# Altium PCB COTS_REVB.PcbDoc
Units mm, origin at the board's own origin, x right, y up, seen from the top; angles counter-clockwise.
Board outline 95.88 x 101.01 mm, 4 copper layers (Top Layer, Layer 1, Layer 2, Bottom Layer), stack 1.586 mm thick; 22 components, 71 nets, 135 pads, 19 vias.
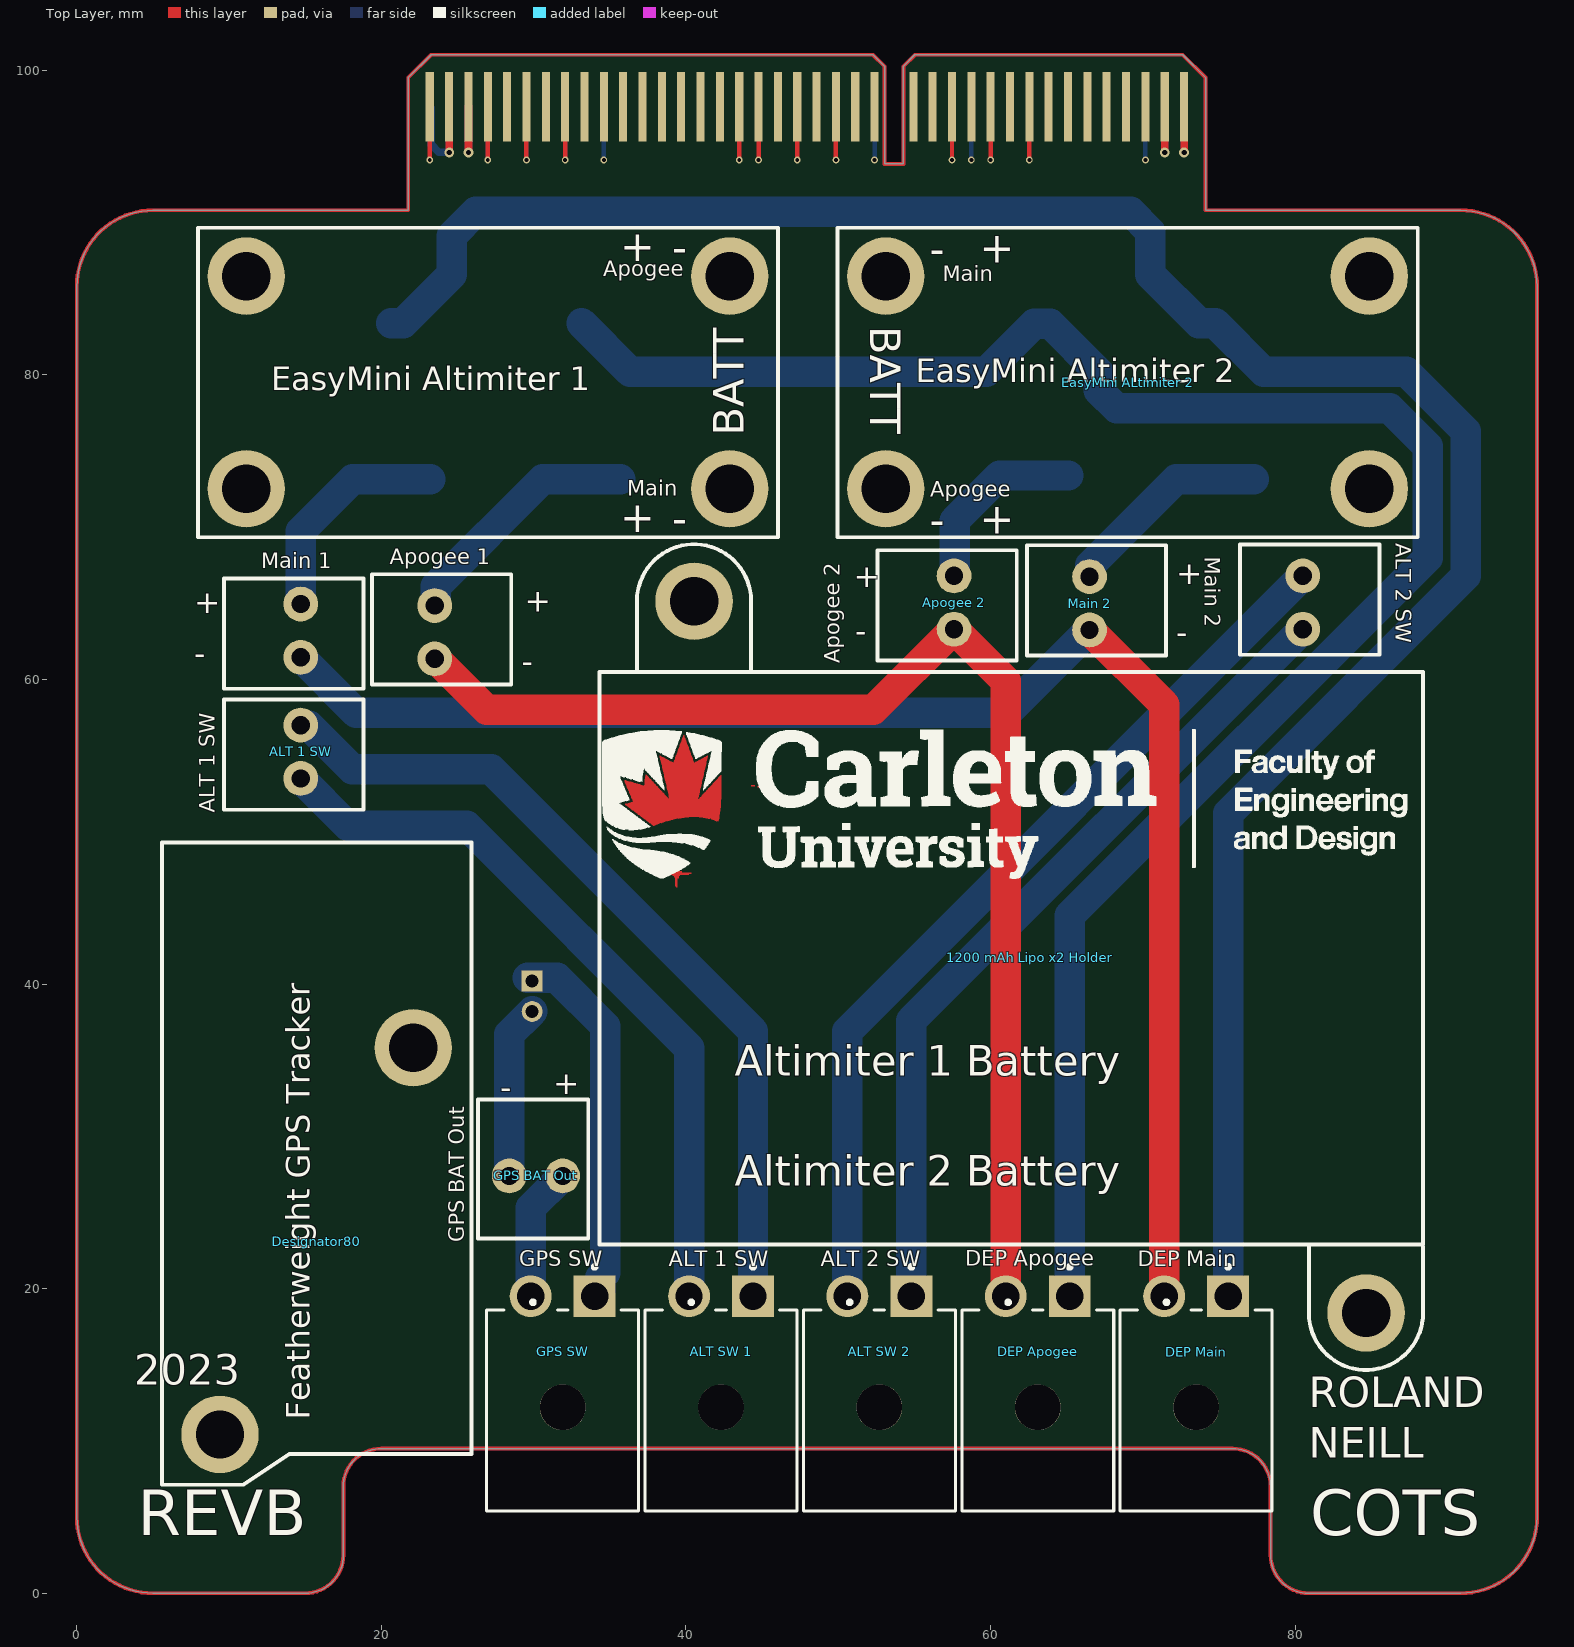
[diagram p0: Top Layer view]
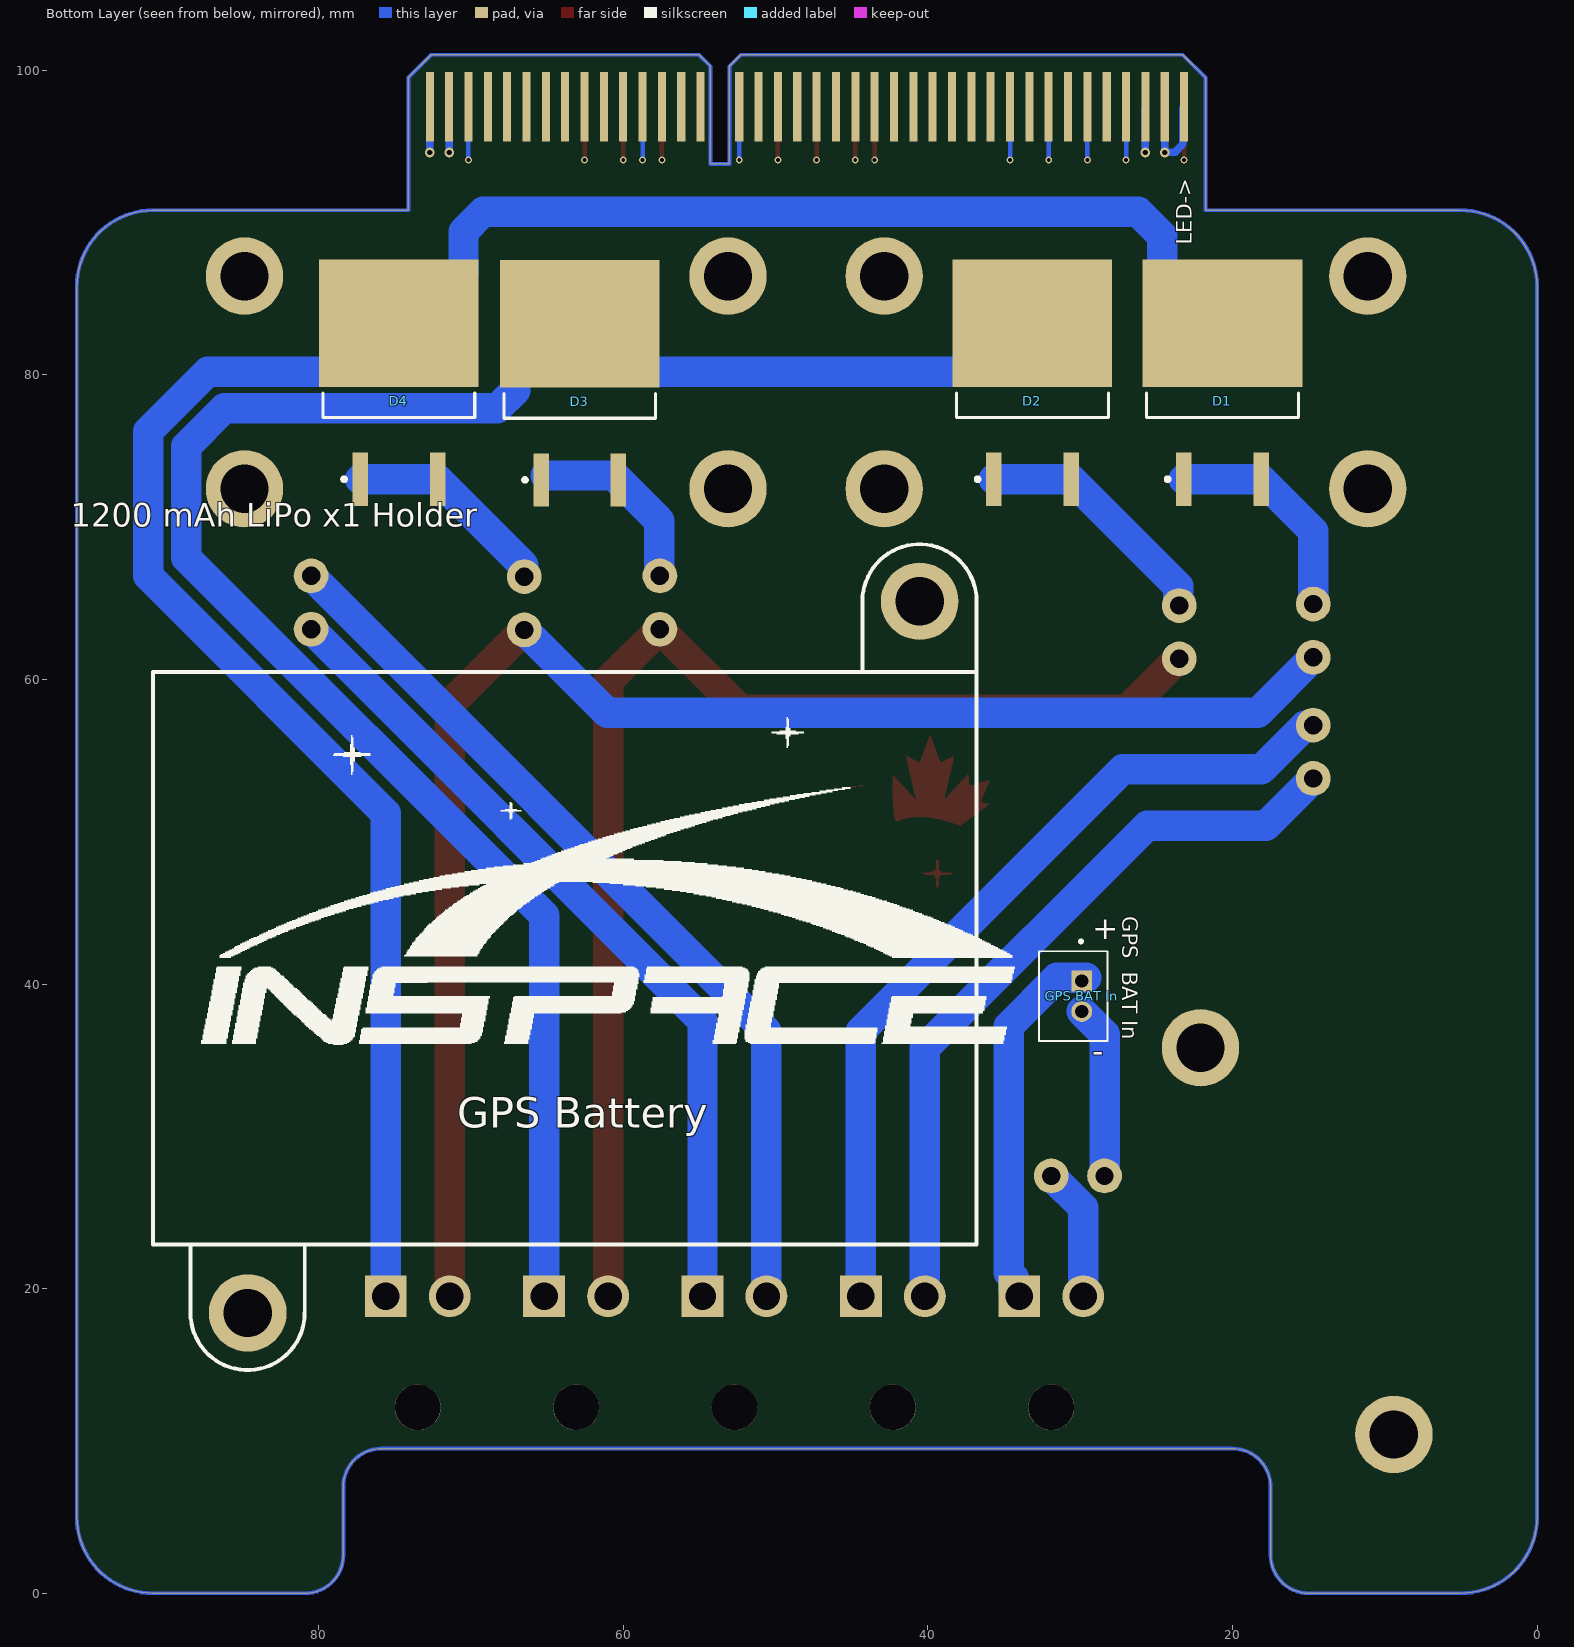
[diagram p1: Bottom Layer view, seen from below]
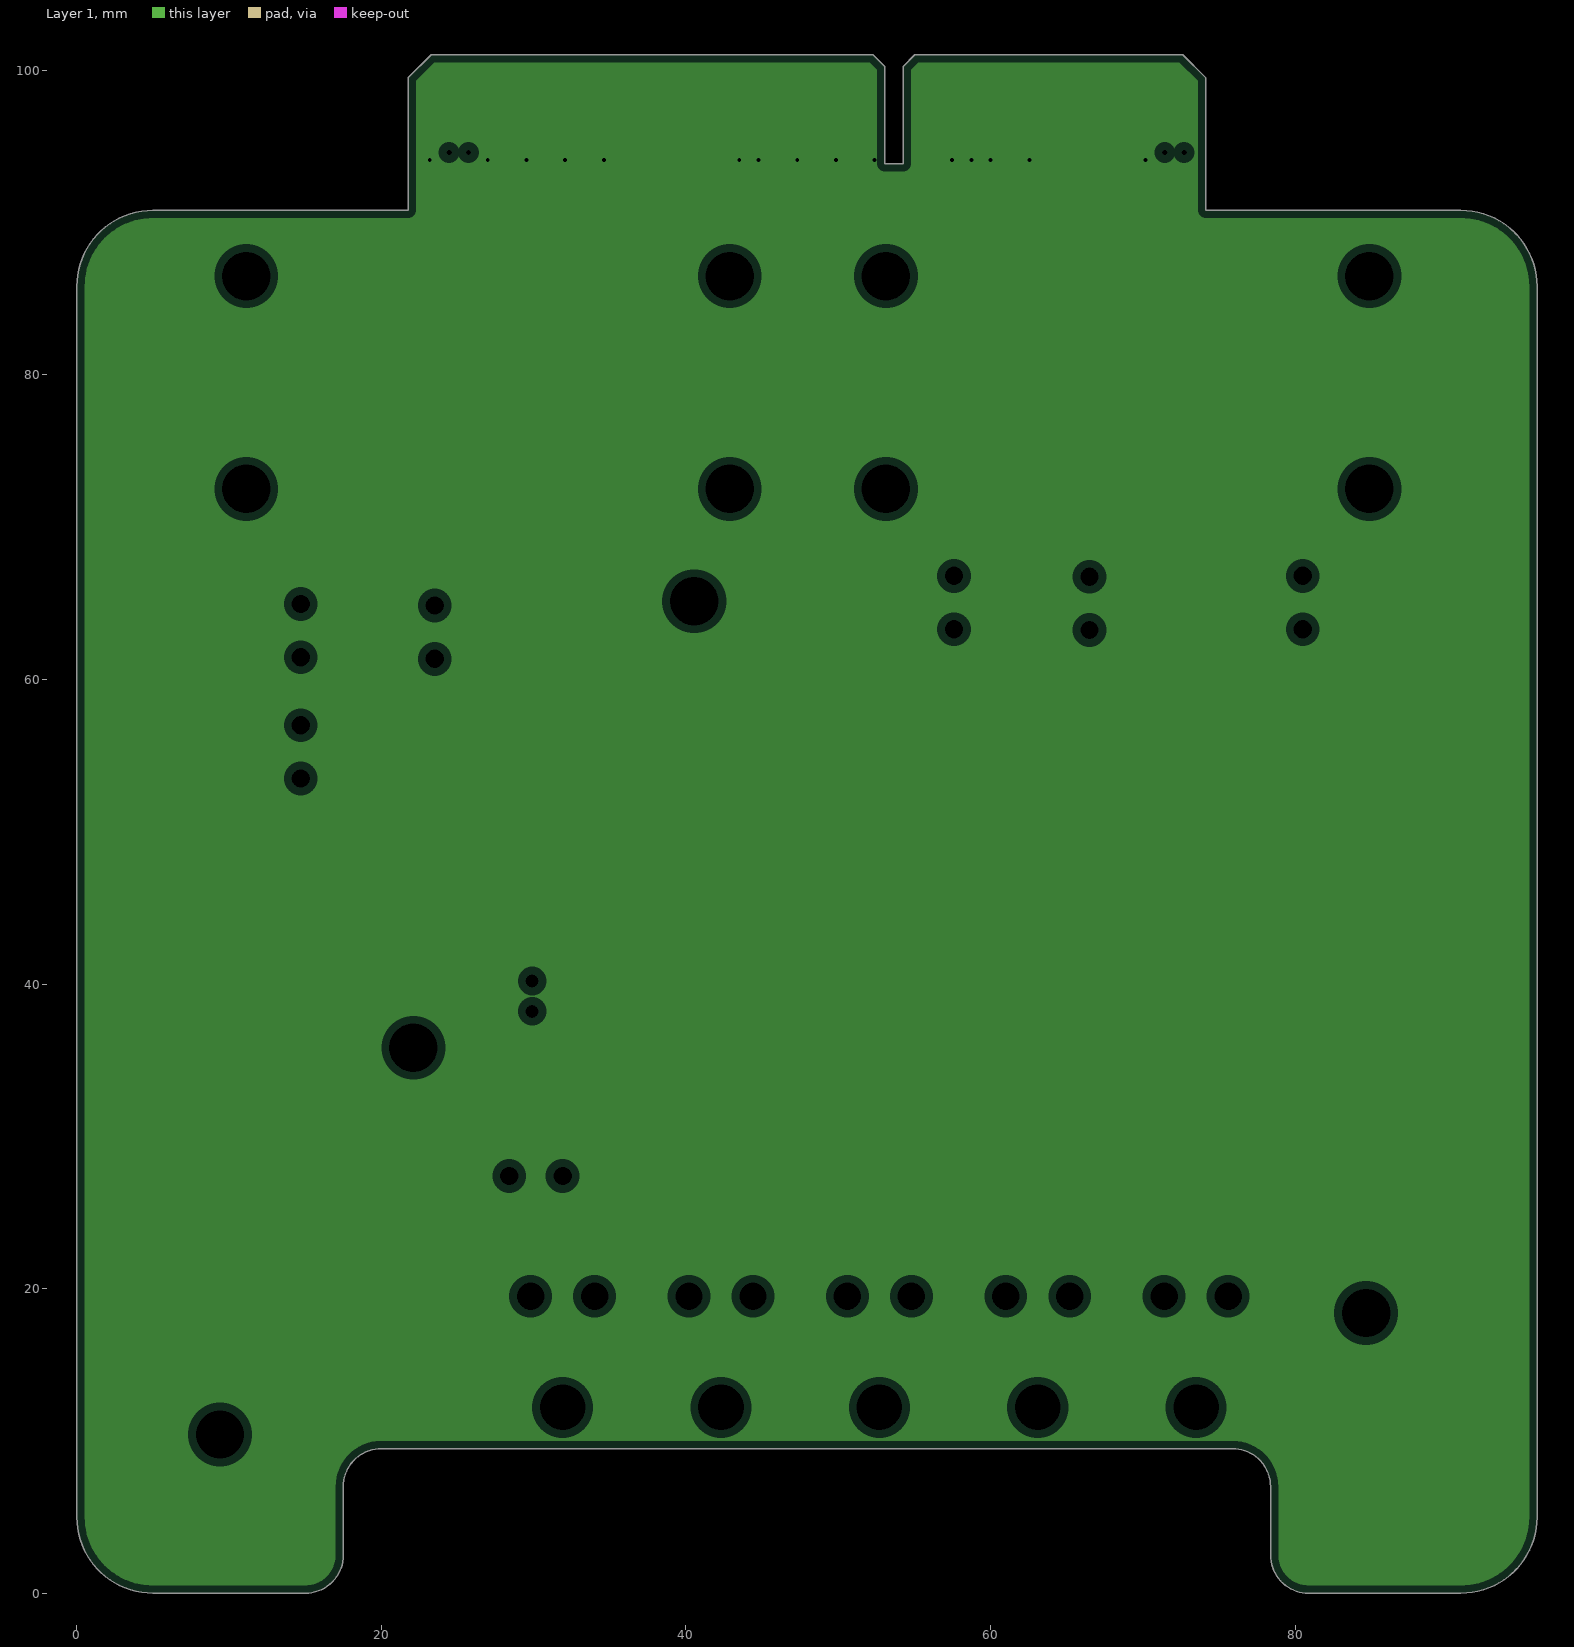
[diagram p2: Layer 1, clearances drawn from the general rule]
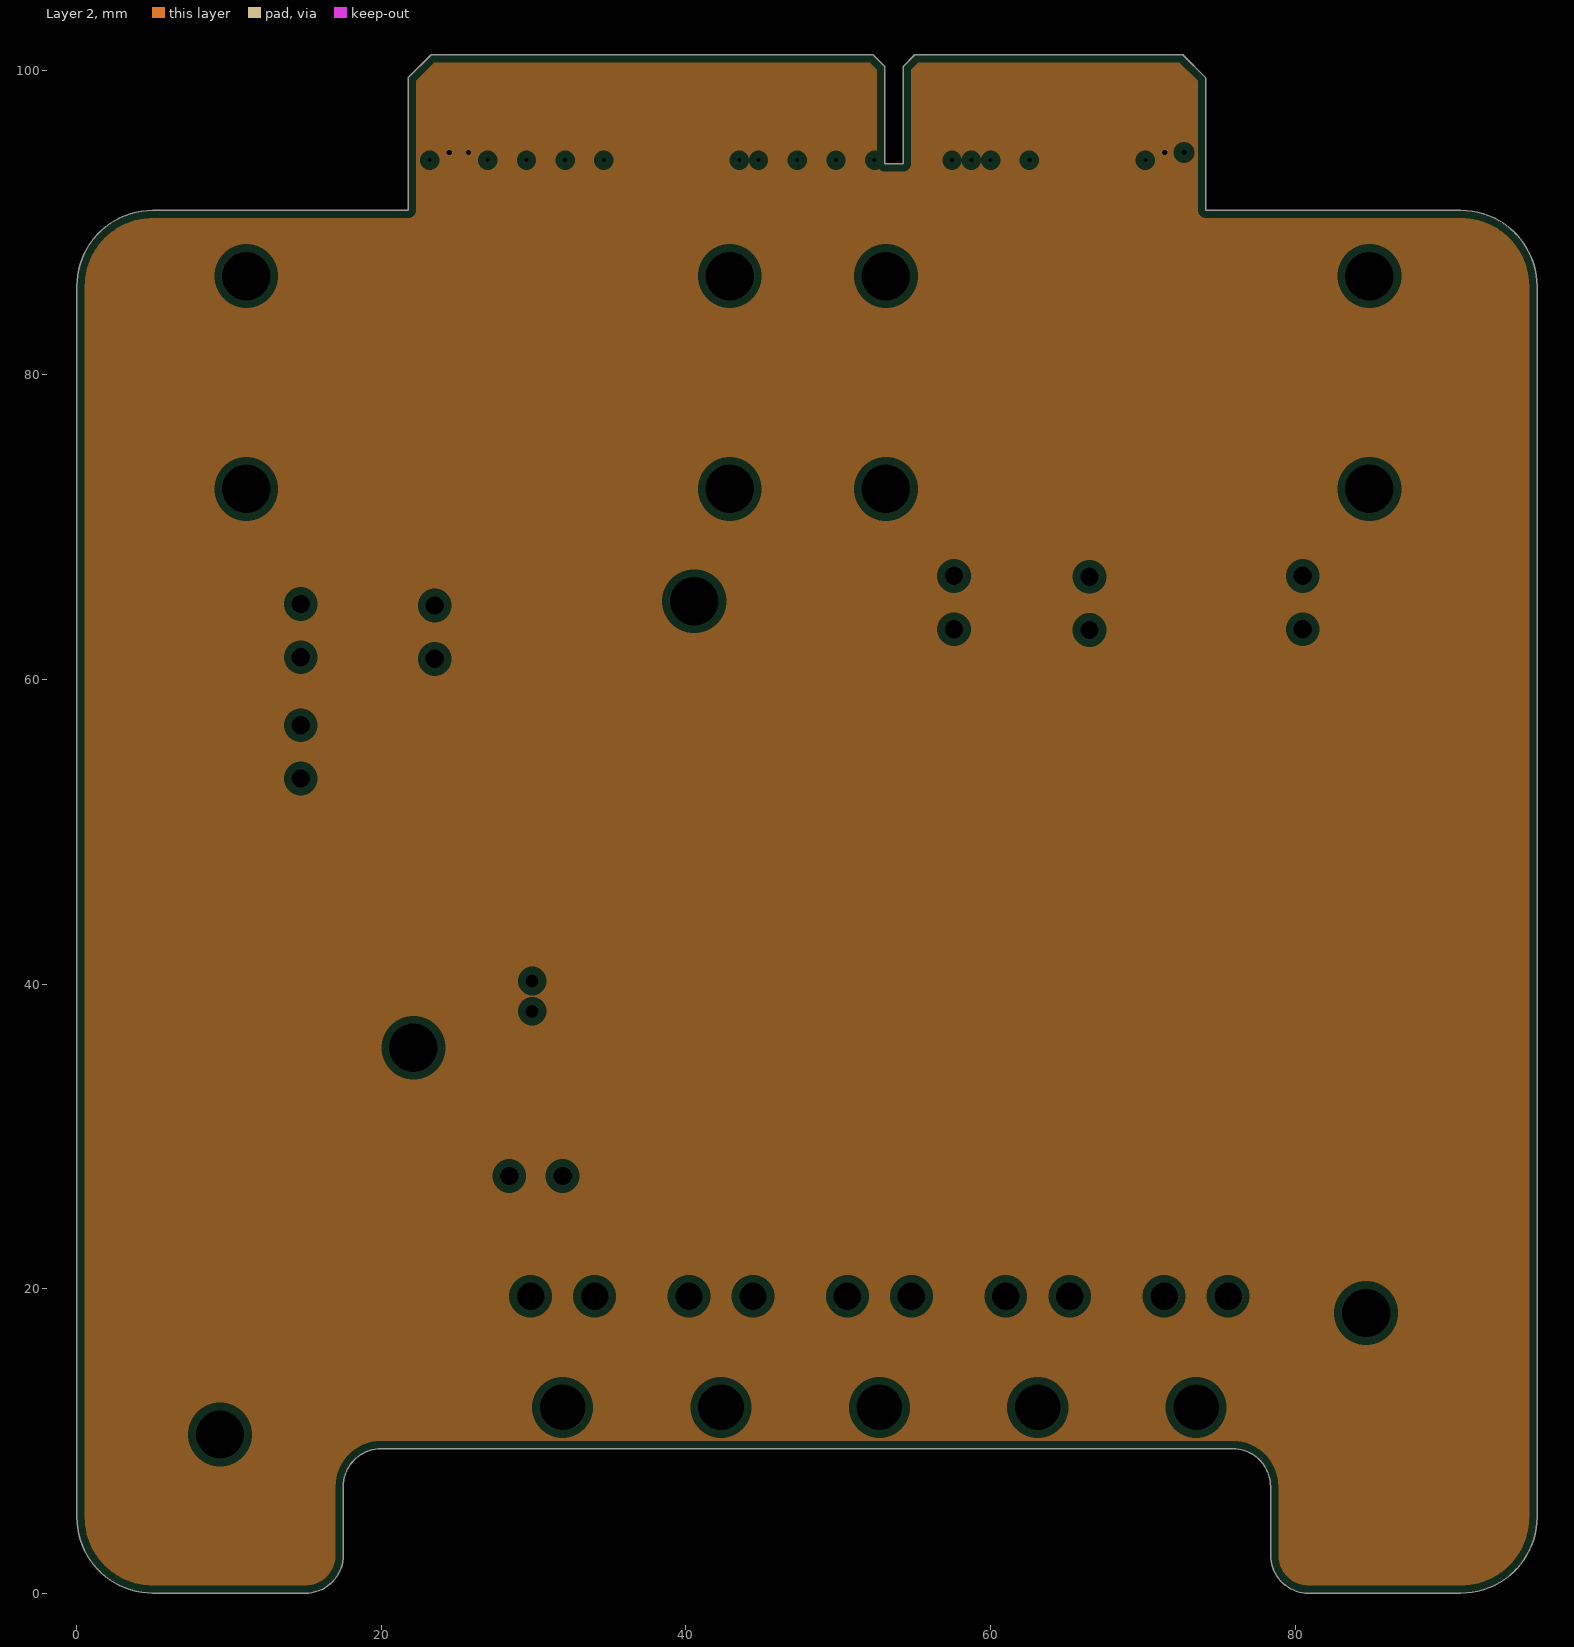
[diagram p3: Layer 2, clearances drawn from the general rule]
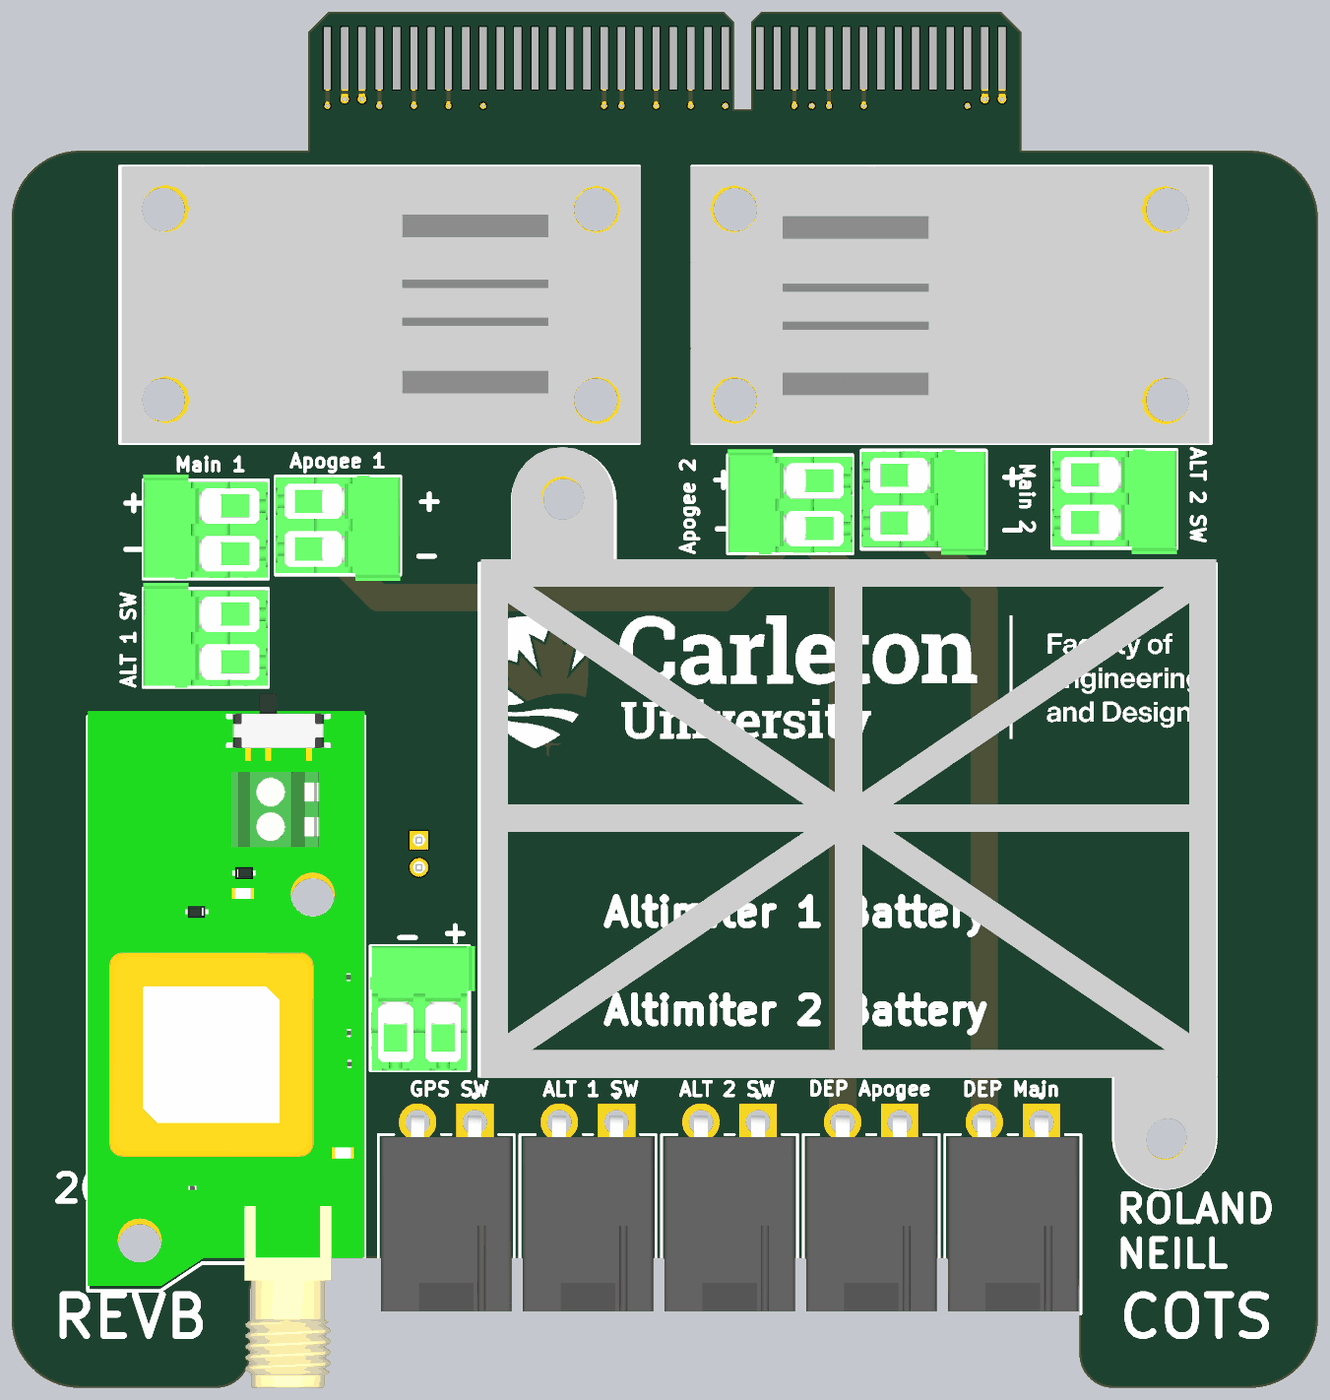
[diagram p4: 3D render of the assembled board from above, using the file's embedded part models]

## Layer stack, top to bottom
Top Solder: solder mask 0.0203, Solder Resist, Dk 3.8
Top Layer: signal copper 0.035
Dielectric 2: prepreg 0.2104, PP-006, Dk 4.6
Layer 1: plane copper 0.0152, net GND
Dielectric 1: dielectric 1.065, FR-4, Dk 4.6
Layer 2: plane copper 0.0152, net +3.3V
Dielectric 3: prepreg 0.2104, PP-006, Dk 4.6
Bottom Layer: signal copper 0.035
Bottom Solder: solder mask 0.0203, Solder Resist, Dk 3.8

## Board outline
5,0 15,0 ccw(c15,2.5) 17.5,2.5 17.5,7 cw(c20,7) 20,9.5 75.885,9.5 cw(c75.885,7) 78.385,7 78.385,2.5 ccw(c80.885,2.5) 80.885,0 90.885,0 ccw(c90.885,5) 95.885,5 95.885,85.805 ccw(c90.885,85.805) 90.885,90.805 74.117,90.805 74.117,99.517 72.617,101.015 55.027,101.015 54.277,100.265 54.277,93.855 53.037,93.855 53.037,100.265 52.287,101.015 23.267,101.015 21.767,99.517 21.768,90.805 5,90.805 ccw(c5,85.805) 0,85.805 0,5 ccw(c5,5)

## Design rules (kind name [scope] priority, off if disabled: settings)
Clearance [All] p1: gap=0.254 ignorepadtopadclearanceinfootprint=TRUE except(0: Arc-Hole Track-Hole SMDPad-Hole THPad-Hole Via-Hole Fill-Hole Poly-Hole Region-Hole Text-Hole; 0.127: Arc-Arc Arc-Track Track-Track SMDPad-SMDPad THPad-THPad)
Height [All] p1: minheight=0 maxheight=15 prefheight=12.7
PlaneClearance [All] p1: clearance=0.508
PlaneConnect [All] p1: pad.planeconnectstyle=Relief pad.reliefexpansion=0.508 pad.reliefentries=4 pad.reliefconductorwidth=0.254 pad.reliefairgap=0.254 via.planeconnectstyle=Direct via.reliefexpansion=0.508 via.reliefentries=4 via.reliefconductorwidth=0.254 via.reliefairgap=0.254
PolygonConnect [All] p1: connectstyle=Relief reliefconductorwidth=0.254 reliefentries=4 polygonreliefangle="90 Angle" airgapwidth=0.254
RoutingVias [All] p1: holewidth=0.254 width=0.445 viastyle="Through Hole" minholewidth=0.2 minwidth=0.4 maxholewidth=6.3 maxwidth=6.4
SolderMaskExpansion [All] p1: expansion=0.102 istentingtop=FALSE
Width [All] p1: maxlimit=4 minlimit=0.127 preferedwidth=0.293 minimp=50.000000 maximp=50.000000 favimp=50.000000
27 further rules are at their usual default settings.

## Components (designator, comment, footprint, x,y, rotation, side; value= is the part's Value field where it differs from the comment)
"1200 mAh LiPo x1 Holder" "1200mAh LiPo x1 Holder" "LiPo Holder-Footprint-1"#1 93.3,22.4 r180 bottom
"1200 mAh Lipo x2 Holder" "" "LiPo Holder-Footprint-1"#2 31.9,22.4 r0 top (schematic designator "1200 mAh LiPo x2 Holder")
"ALT 1 SW" "1984769" 1984769-Footprint-1#1 17.8,55.25 r0 top
"ALT 2 SW" "1984769" 1984769-Footprint-1#1 77.4,65.05 r180 top
"ALT SW 1" "CMP-04776-000216-1" FP-172648-0102-MFG 42.3,12 r0 top
"ALT SW 2" "CMP-04776-000216-1" FP-172648-0102-MFG 52.7,12 r0 top
"Apogee 1" "1984769" 1984769-Footprint-1#1 20.4,63.1 r180 top
"Apogee 2" "1984769" 1984769-Footprint-1#1 60.7,65.05 r0 top
D1 "MBRB2545CTT4G" ONSC-D2PAK-3-418B-04_V 20.66,79.5 r90 bottom
D2 "MBRB2545CTT4G" ONSC-D2PAK-3-418B-04_V 33.14,79.5 r90 bottom
D3 "MBRB2545CTT4G" ONSC-D2PAK-3-418B-04_V 62.86,79.45 r90 bottom
D4 "MBRB2545CTT4G" ONSC-D2PAK-3-418B-04_V 74.74,79.5 r90 bottom
"DEP Apogee" "CMP-04776-000216-1" FP-172648-0102-MFG 63.1,12 r0 top
"DEP Main" "CMP-04776-000216-1" FP-172648-0102-MFG 73.5,12 r0 top
Designator80 "Comment" Featherweight-Footprint-1 5.59,7.119 r90 top
"EasyMini Altimiter 1" "EasyMini" EasyMini-Footprint-1 27,79.5 r180 top
"EasyMini ALtimiter 2" "EasyMini" EasyMini-Footprint-1 69,79.5 r0 top (schematic designator "EasyMini Altimiter 2")
"GPS BAT In" "B2B-PH-K-S(LF)(SN)" JST_B2B-PH-K-S(LF)(SN) 30.45,39.2 r90 bottom
"GPS BAT Out" "1984769" 1984769-Footprint-1#2 30.15,24.3 r270 top
"GPS SW" "CMP-04776-000216-1" FP-172648-0102-MFG 31.9,12 r0 top
"Main 1" "1984769" 1984769-Footprint-1#1 17.8,63.2 r0 top
"Main 2" "1984769" 1984769-Footprint-1#1 63.4,65 r180 top

## Footprints (in the part's own frame and the unit in brackets; to place one, negate y for a bottom-side part, rotate by r counter-clockwise, add the part's x,y. Pads: shape width x height; smd on the part's side, far side on the other; paste and mask are expansions set on the pad)
1984769-Footprint-1#1 [mm]
  round 2.286 hole 1.2: 1(-3.1,1.75) 2(-3.1,-1.75)
  silkscreen extent -8.13,-3.81 1.02,3.43, body extent -8.13,-3.85 1.02,3.85, height 7.55
1984769-Footprint-1#2 [mm]
  round 2.286 hole 1.2: 1(-3.1,1.75) ""(-3.1,-1.75)
  silkscreen extent -8.13,-3.81 1.02,3.43, body extent -8.13,-3.85 1.02,3.85, height 7.55
EasyMini-Footprint-1 [mm]
  round 5.08 hole 3.175: 80(-15.875,6.985) 81(15.875,6.985) 82(15.875,-6.985) 83(-15.875,-6.985)
  silkscreen extent -19.05,-10.16 19.05,10.16, body extent -19.18,-10.18 18.92,10.15, height 14.08
Featherweight-Footprint-1 [mil]
  round 200 hole 125: 84(130,-150) 85(1130,-650)
  silkscreen extent 0,-800 1660,0, body extent -280,-800 1729,0, height 556
FP-172648-0102-MFG [mm]
  rect 2.75x2.75 hole 1.8 paste-1000 mask+0: 1(2.1,7.5)
  round 2.75 hole 1.8 paste-1000 mask+0: 2(-2.1,7.5)
  round 3 hole 3 unplated paste-1000 mask+0: ""(0,0.2)
  silkscreen extent -4.99,-6.59 4.99,9.55, body extent -5.09,-6.69 5.09,8.98, height 0.25
JST_B2B-PH-K-S(LF)(SN) [mm]
  rect 1.368x1.368 hole 0.86: 1(1,-0.55)
  round 1.368 hole 0.86: 2(-1,-0.55)
  silkscreen extent -2.95,-2.25 3.7,2.25, body extent -2.95,-2.25 2.95,2.25, height 6
"LiPo Holder-Footprint-1"#1 [mm]
  round 5.08 hole 3.175: 88(52.75,42.73) 89(8.627,-4)
  silkscreen extent 2.41,-7.75 56.5,46.48, body extent 2.41,-7.96 56.41,46.54, height 8
"LiPo Holder-Footprint-1"#2 [mm]
  round 5.08 hole 3.175: 88(8.627,42.73) 89(52.75,-4)
  silkscreen extent 2.41,-7.75 56.5,46.48, body extent 2.54,-7.84 56.54,46.66, height 14
ONSC-D2PAK-3-418B-04_V [mm] "DPAK, 3-Leads, Body 9.97x9.145mm, Pitch 2.54mm"
  rect 3.504x1.016 smd: 1(-6.35,2.54) 3(-6.35,-2.54)
  rect 8.38x10.49 smd: 4(3.9,0)
  silkscreen extent -6.47,-4.98 -0.69,4.98, body extent -2.3,-4.98 6.85,4.98, height 4.83

## Part data
"1200 mAh LiPo x1 Holder": library part CMP-00028-00013-3, "Holder for LiPo Pouch Type Battery"
"1200 mAh Lipo x2 Holder": library part CMP-00028-00011-11, "Holder for LiPo Pouch Type Battery"
"ALT 1 SW" "ALT 2 SW" "Apogee 1" "Apogee 2" "GPS BAT Out" "Main 1" "Main 2": library part CMP-00028-00010-2, "Terminal Block, Printed Circuit; 10 A; 160 V; 3.5 mm; 2; 3.5 mm; 1.2 mm; M2; PA"
"ALT SW 1" "ALT SW 2" "DEP Apogee" "DEP Main" "GPS SW": library part CMP-003-000005-1, "CONN HEADER R/A 2POS 4.2MM", Manufacturer=Molex, Manufacturer Part Number=172648-0102, Component Type=Standard, Design Item ID=CMP-04776-000216-1, Pin Count=2, Source=CON_REVD.SCHLIB
D1 D2 D3 D4: library part CMP-004-00032-1, "Rectifier Diode Schottky 45V 30A 3-Pin(2+Tab) D2PAK T/R", Case/Package=D2PAK
"EasyMini Altimiter 1" "EasyMini ALtimiter 2": library part CMP-00028-00008-4
"GPS BAT In": "PH Series 2 Position 2 mm Pitch Through Hole Top Entry Shrouded Header", Package=None, Availability=Unavailable, MF="{'manufacturer': u'JST Sales'}", MP=B2B-PH-K-S(LF)(SN), Price=None

## Free pads (board coordinates)
  rect 0.53x4.572 smd: 1(72.707,97.6) 3(71.437,97.6) 5(70.167,97.6) 7(68.897,97.6) 9(67.627,97.6) 11(66.357,97.6) 13(65.087,97.6) 15(63.817,97.6) 17(62.547,97.6) 19(61.277,97.6) 21(60.007,97.6) 23(58.737,97.6) 25(57.467,97.6) 27(56.197,97.6) 29(54.927,97.6) 31(52.387,97.6) 33(51.117,97.6) 35(49.847,97.6) 37(48.577,97.6) 39(47.307,97.6) 41(46.037,97.6) 43(44.767,97.6) 45(43.497,97.6) 47(42.227,97.6) 49(40.957,97.6) 51(39.687,97.6) 53(38.417,97.6) 55(37.147,97.6) 57(35.877,97.6) 59(34.607,97.6) 61(33.337,97.6) 63(32.067,97.6) 65(30.797,97.6) 67(29.527,97.6) 69(28.257,97.6) 71(26.987,97.6) 73(25.717,97.6) 75(24.447,97.6) 77(23.177,97.6)
  rect 0.53x4.572 smd far side: 2(72.707,97.6) 4(71.437,97.6) 6(70.167,97.6) 8(68.897,97.6) 10(67.627,97.6) 12(66.357,97.6) 14(65.087,97.6) 16(63.817,97.6) 18(62.547,97.6) 20(61.277,97.6) 22(60.007,97.6) 24(58.737,97.6) 26(57.467,97.6) 28(56.197,97.6) 30(54.927,97.6) 32(52.387,97.6) 34(51.117,97.6) 36(49.847,97.6) 38(48.577,97.6) 40(47.307,97.6) 42(46.037,97.6) 44(44.767,97.6) 46(43.497,97.6) 48(42.227,97.6) 50(40.957,97.6) 52(39.687,97.6) 54(38.417,97.6) 56(37.147,97.6) 58(35.877,97.6) 60(34.607,97.6) 62(33.337,97.6) 64(32.067,97.6) 66(30.797,97.6) 68(29.527,97.6) 70(28.257,97.6) 72(26.987,97.6) 74(25.717,97.6) 76(24.447,97.6) 78(23.177,97.6)

## Via types
v1: diameter 0.444, hole 0.254, Top Layer to Bottom Layer, 15 vias
v2: diameter 0.635, hole 0.356, Top Layer to Bottom Layer, 4 vias

## Nets (pads, with @x,y where several pads share a name; then routed paths per layer and width w, separated by ;. In a path a pad name is that pad's centre, name@x,y a point inside that pad or via, vN(x,y) a via of type N, cw(c..) or ccw(c..) an arc to the next point about the centre after c; other vN are vias at no path point)
+3.3V: pad.3 pad.4 pad.73 pad.74 pad.75 pad.76 pad.78 | length 21.9
  Top Layer w0.5: v2(24.447,94.6) pad.75 ; v2(25.717,94.6) pad.73 ; v2(71.437,94.6) pad.3
  Bottom Layer w0.5: pad.78 23.257,97.52 23.257,95.143 23.774,94.626 24.421,94.626 v2(24.447,94.6) pad.76 ; v2(25.717,94.6) pad.74 ; v2(71.437,94.6) pad.4
+5V: pad.1 pad.2 | length 6
  Top Layer w0.5: v2(72.707,94.6) pad.1
  Bottom Layer w0.5: v2(72.707,94.6) pad.2
A0: pad.22
A1: pad.20
A2: pad.18
A3: pad.16
A4: pad.14
A5: pad.12
A6: pad.10
A7: pad.8
A12: pad.31
A13: pad.33
DAC0: pad.41
DAC1: pad.37
GND: pad.6 pad.17 pad.21 pad.24 pad.25 pad.32 pad.35 pad.39 pad.43 pad.45 pad.60 pad.63 pad.64 pad.67 pad.68 pad.71 pad.72 pad.77 | length 63
  Top Layer w0.293: v1(23.177,94.1) pad.77 ; v1(26.987,94.1) pad.71 ; v1(29.527,94.1) pad.67 ; v1(32.067,94.1) pad.63 ; v1(43.497,94.1) pad.45 ; v1(44.767,94.1) pad.43 ; v1(47.307,94.1) pad.39 ; v1(49.847,94.1) pad.35 ; v1(57.467,94.1) pad.25 ; v1(60.007,94.1) pad.21 ; v1(62.547,94.1) pad.17
  Bottom Layer w0.293: v1(26.987,94.1) pad.72 ; v1(29.527,94.1) pad.68 ; v1(32.067,94.1) pad.64 ; v1(34.607,94.1) pad.60 ; v1(52.387,94.1) pad.32 ; v1(58.737,94.1) pad.24 ; v1(70.167,94.1) pad.6
GPIO0: pad.58
GPIO1: pad.56
GPIO2: pad.54
GPIO3: pad.52
GPIO4: pad.50
GPIO5: pad.48
GPIO6: pad.46
GPIO7: pad.44
GPIO8: pad.42
GPIO9: pad.40
GPIO10: pad.38
GPIO11: pad.36
GPIO12: pad.34
GPIO13: pad.30
GPIO14: pad.28
GPIO15: pad.26
GPIO22: pad.27
GPIO23: pad.29
I2C0_SCL: pad.69
I2C0_SDA: pad.65
I2C1_SCL: pad.23
I2C1_SDA: pad.19
"NetALT 1 SW_1": "ALT 1 SW.1" "ALT SW 1.1" | length 55.4
  Bottom Layer w2: 14.7,57 14.755,56.945 15.255,56.945 18.1,54.1 27.2,54.1 44.4,36.9 44.4,19.5
"NetALT 1 SW_2": "ALT 1 SW.2" "ALT SW 1.2" | length 49.1
  Bottom Layer w2: 14.7,53.5 17.8,50.4 25.6,50.4 40.2,35.8 40.2,19.5
"NetALT 2 SW_1": "ALT 2 SW.1" "ALT SW 2.1" | length 54.4
  Bottom Layer w2: 54.8,19.5 54.8,37.6 80.5,63.3
"NetALT 2 SW_2": "ALT 2 SW.2" "ALT SW 2.2" | length 59.7
  Bottom Layer w2: 50.6,19.5 50.6,36.9 80.5,66.8
"NetApogee 1_1": "Apogee 1.1" "Apogee 2.2" "DEP Apogee.2" | length 82.9
  Top Layer w2: 23.5,61.35 23.577,61.35 26.927,58 52.3,58 57.6,63.3 61,59.9 61,19.5
"NetApogee 1_2": "Apogee 1.2" D2.1 D2.3 | length 16.3
  Bottom Layer w2: 23.5,64.85 23.555,64.905 23.555,66.105 D2.3 D2.1
"NetApogee 2_1": "Apogee 2.1" D3.1 D3.3 | length 12.3
  Bottom Layer w2: 57.6,66.8 57.655,66.855 57.655,70.435 60.612,73.392 D3.1@65.108,73.392
NetD1_1: "Main 1.1" D1.1 D1.3 | length 14.7
  Bottom Layer w2: 14.7,64.95 14.7,69.73 D1.3 D1.1
NetD1_4: "DEP Main.1" D1.4 D4.4 | length 145.9
  Bottom Layer w2: D1.4 21.429,83.4 24.619,86.59 24.619,89.119 26.2,90.7 69.2,90.7 70.495,89.405 70.495,86.59 73.685,83.4 D4.4 77.93,80.21 87.29,80.21 91.2,76.3 91.2,66.8 75.6,51.2 75.6,19.5
NetD2_1: 
NetD2_4: "DEP Apogee.1" D2.4 D3.4 | length 127.8
  Bottom Layer w2: D2.4 36.33,80.21 38.547,80.21 38.557,80.2 59.71,80.2 D3.4 63.915,83.35 67.105,80.16 67.105,78.972 68.277,77.8 86.2,77.8 88.7,75.3 88.7,68 65.2,44.5 65.2,19.5
NetD4_1: "Main 2.2" D4.1 D4.3 | length 13.8
  Bottom Layer w2: 66.5,66.75 66.555,66.805 66.555,67.505 D4.3 D4.1
"NetDEP Main_1": 
"NetDEP Main_2": "DEP Main.2" "Main 1.2" "Main 2.1" | length 101.3
  Top Layer w2: 66.5,63.25 71.4,58.35 71.4,19.5
  Bottom Layer w2: 14.7,61.45 18.35,57.8 61.05,57.8 66.5,63.25
"NetGPS BAT In_1": "GPS BAT In.1" "GPS SW.1" | length 24.4
  Bottom Layer w2: 29.6,40.4 31.536,40.4 34.7,37.236 34.7,21.047 34.375,20.722 34.375,19.875 34,19.5
"NetGPS BAT In_2": "GPS BAT In.2" "GPS BAT Out." | length 11.4
  Bottom Layer w2: 28.4,27.4 28.4,36.7 29.9,38.2
"NetGPS BAT Out_1": "GPS BAT Out.1" "GPS SW.2" | length 8.8
  Bottom Layer w2: 29.8,19.5 29.8,25.3 31.9,27.4
PORT0: pad.15
PORT1: pad.13
PORT2: pad.11
PORT3: pad.9
PORT4: pad.7
PORT5: pad.5
SPI_MISO: pad.62
SPI_MOSI: pad.66
SPI_SCK: pad.70
UART0_RX: pad.61
UART0_TX: pad.59
UART1_RX: pad.57
UART1_TX: pad.55
UART2_RX: pad.53
UART2_TX: pad.51
UART3_RX: pad.49
UART3_TX: pad.47
pads on no net: "1200 mAh LiPo x1 Holder.88" "1200 mAh LiPo x1 Holder.89" "1200 mAh Lipo x2 Holder.88" "1200 mAh Lipo x2 Holder.89" "ALT SW 1." "ALT SW 2." "DEP Apogee." "DEP Main." "EasyMini Altimiter 1.80" "EasyMini Altimiter 1.81" "EasyMini Altimiter 1.82" "EasyMini Altimiter 1.83" "EasyMini ALtimiter 2.80" "EasyMini ALtimiter 2.81" "EasyMini ALtimiter 2.82" "EasyMini ALtimiter 2.83" "GPS SW." Designator80.84 Designator80.85

## Polygon pours and split planes (outlines as drawn)
GND on Layer 1 (split plane): 298 vertices, not listed, extent 0.509,0.509 95.376,100.505
+3.3V on Layer 2 (split plane): 298 vertices, not listed, extent 0.509,0.509 95.376,100.505

## Other copper
Top Layer:
  region: 40.184,47.172 39.588,47.172 39.588,47.097 39.513,47.097 39.513,46.948 39.439,46.948 39.439,46.352 39.364,46.352 39.364,46.427 39.29,46.427 39.29,47.023 39.215,47.023 39.215,47.097 39.141,47.097 39.141,47.172 38.545,47.172 38.545,47.246 38.396,47.246 38.396,47.321 39.067,47.321 39.067,47.395 39.215,47.395 39.215,47.469 39.29,47.469 39.29,48.14 39.439,48.14 39.439,47.544 39.513,47.544 39.513,47.395 39.737,47.395 39.737,47.321 40.333,47.321 40.333,47.246 40.184,47.246
  region: 45.099,52.981 45.099,52.906 44.727,52.906 44.727,52.981 45.025,52.981
  region: 44.354,53.055 44.503,53.055 44.503,52.981 44.28,52.981 44.28,53.055
  region: 780 vertices and 0 holes, not listed, extent 35.966,50.408 42.306,56.32
Multi-Layer:
  the board outline again, w0.254

## Silkscreen, mask and mechanical layers (free items; w line width, h text height)
Top Overlay:
  drawing of 58 lines, arcs and shapes, not listed
  text "+" at 35.7,87.467 h2
  text "-" at 39.1,87.4 h2
  text "+" at 59.3,87.367 h2
  text "-" at 56,87.3 h2
  text "Apogee" at 34.554,86.487 h1
  text "Main" at 56.854,86.154 h1
  text "BATT" at 52.1,83.2 h2 r270
  text "EasyMini Altimiter 2" at 55.1,79.508 h1.52
  text "BATT" at 43.8,76 h2 r90
  text "Main" at 36.154,72.054 h1
  text "Apogee" at 56.054,71.987 h1
  text "+" at 35.7,69.667 h2
  text "-" at 39.1,69.6 h2
  text "+" at 59.3,69.567 h2
  text "-" at 56,69.5 h2
  text "Main 2" at 74.054,68.046 h1 r270
  text "+" at 72.2,66.25 h1.5
  text "+" at 51,66.05 h1.5
  text "+" at 29.4,64.45 h1.5
  text "+" at 7.7,64.35 h1.5
  text "-" at 51.1,62.45 h1.5
  text "-" at 72.2,62.35 h1.5
  text "Apogee 2" at 50.113,61.054 h1 r90
  text "-" at 7.7,60.95 h1.5
  text "-" at 29.2,60.45 h1.5
  text "ALT 1 SW" at 9.046,51.254 h1 r90
  text "Altimiter 1 Battery" at 43.2,33.966 h2
  text "+" at 31.3,32.75 h1.5
  text "-" at 27.8,32.45 h1.5
  text "Altimiter 2 Battery" at 43.2,26.766 h2
  text "GPS BAT Out" at 25.446,23.054 h1 r90
  text "DEP Apogee" at 58.354,21.487 h1
  text "GPS SW" at 29.054,21.454 h1
  text "ALT 1 SW" at 38.854,21.454 h1
  text "ALT 2 SW" at 48.854,21.454 h1
  text "DEP Main" at 69.654,21.454 h1
  text "2023" at 3.769,13.7 h2
  text "ROLAND" at 80.9,12.2 h2
  text "Featherweight GPS Tracker" at 15.292,11.4 h1.52 r90
  text "NEILL" at 80.9,8.9 h2
  text "REVB" at 3.996,3.808 h3
  text "COTS" at 81.008,3.808 h3
Bottom Overlay:
  drawing of 10 lines, arcs and shapes, not listed
  text "LED->" at 22.677,88.554 h1 r270
  text "GPS  BAT In" at 27.246,44.446 h1 r90
  text "+" at 29.2,42.95 h1.5
  text "-" at 29.2,34.85 h1.5
  text "GPS Battery" at 70.9,30.566 h2